# EAGLE board Smashing Hillar (EAGLE 9.7.0)

Size 176.64 x 41.52 mm. Coordinates in mm from the lower left corner, seen from the top.
Outline: 0,0 176.64,0 176.64,41.52 0,41.52 0,0
Copper layers (1*16): Top 0.035mm / dielectric 1.5mm / Bottom 0.035mm
Design rules "default": minimum track width 6mil, minimum drill 0.35mm, track to track 6mil, track to pad 6mil, pad to pad 6mil, via to via 6mil, smd to smd 6mil, copper to edge 40mil, drill to drill 6mil, minimum pad ring 10mil, minimum via ring 8mil, stop-mask expansion 4mil, vias tented up to drill 0mil, thermal gap 10mil

## Footprints (pad centres in the part's own frame; a part is rotated, then mirrored left to right if it is on the bottom)
BAT_3002 = smd 3.96 x 3.96: N 0,0.65 | smd 5.08 x 5.08: P 12.825,0.65; P1 -12.825,0.65
LED-RGB-RCGB-5MM = drill 0.9: B 1.905,-0.635; C -0.635,-0.635; G 0.635,0.635; R -1.905,0.635
RESAD1016W63L850D250B = drill 0.83 pad 1.43: 1 -5.08,0; 2 5.08,0
SWITCH-SPDT-PTH-8.5X3.7MM = drill 1.016 pad 1.88: 1 -2.54,0; 2 0,0; 3 2.54,0
DIP762W53P254L1969H508Q14B = drill 0.743 pad 1.343: 1 -3.81,7.62; 2 -3.81,5.08; 3 -3.81,2.54; 4 -3.81,0; 5 -3.81,-2.54; 6 -3.81,-5.08; 7 -3.81,-7.62; 8 3.81,-7.62; 9 3.81,-5.08; 10 3.81,-2.54; 11 3.81,0; 12 3.81,2.54; 13 3.81,5.08; 14 3.81,7.62

## Placement (x,y rotation side)
BAT1  BR2016  [BAT_3002]  15.76,20.19 90 top
D1  LED-RGBRCGB-PTH  [LED-RGB-RCGB-5MM]  142.67,34.03 0 top
R1  1k  [RESAD1016W63L850D250B]  138.86,16.25 0 top
R2  1k  [RESAD1016W63L850D250B]  141.4,13.71 0 top
R4  1k  [RESAD1016W63L850D250B]  154.1,28.95 0 top
S1  TOGGLE  [SWITCH-SPDT-PTH-8.5X3.7MM]  49.96,26.41 180 top
S2  TOGGLE  [SWITCH-SPDT-PTH-8.5X3.7MM]  82.98,8.63 180 top
U1  74HC08_PDIP  [DIP762W53P254L1969H508Q14B]  67.74,20.06 90 top
U2  74HC00_PDIP  [DIP762W53P254L1969H508Q14B]  98.22,20.06 90 top
U3  74HC32_PDIP  [DIP762W53P254L1969H508Q14B]  161.72,20.06 90 top

## Library data of the parts
BAT1 = Tinkercad; CATEGORY: Battery-Holder; CELL_DIAMETER: 20mm; DESCRIPTION: Battery Retainer Coin, 20.0mm 1 Cell SMD (SMT) Tab; MANUFACTURER: Keystone Electronics; MPN: 3002; PART_STATUS: ACTIVE; ROHS_COMPLIANT: COMPLIANT; SERIES: -; SUB_CATEGORY: Holder; TYPE: Coin Cell
D1 R1 R2 R4 S1 S2 U1-U3 = Tinkercad

## Nets
BAT1+: BAT1.P BAT1.P1 S1.2 S2.2 U1.14 U2.14 U3.14
BAT1-: BAT1.N D1.C U1.7 U2.5 U2.7 U3.7
D1_B: D1.B R2.2
D1_G: D1.G R1.2
D1_R: D1.R R4.1
U1_1B: R1.1 S2.1 U1.2 U2.1 U3.1
U2_1Y: R2.1 U2.3
U3_1B: S1.1 U1.1 U2.2 U2.13 U3.2
U3_1Y: R4.2 U3.3 U3.12

## Tracks (layer width: path | path; a pad name or v marks a point on that pad's centre or on a via)
BAT1+  (6 unrouted)
BAT1-  (5 unrouted)
D1_B  (1 unrouted)
D1_G  (1 unrouted)
D1_R  (1 unrouted)
U1_1B  (4 unrouted)
U2_1Y  (1 unrouted)
U3_1B  (4 unrouted)
U3_1Y  (2 unrouted)